# EAGLE board nitwhips_v1.0 (EAGLE 5.09)
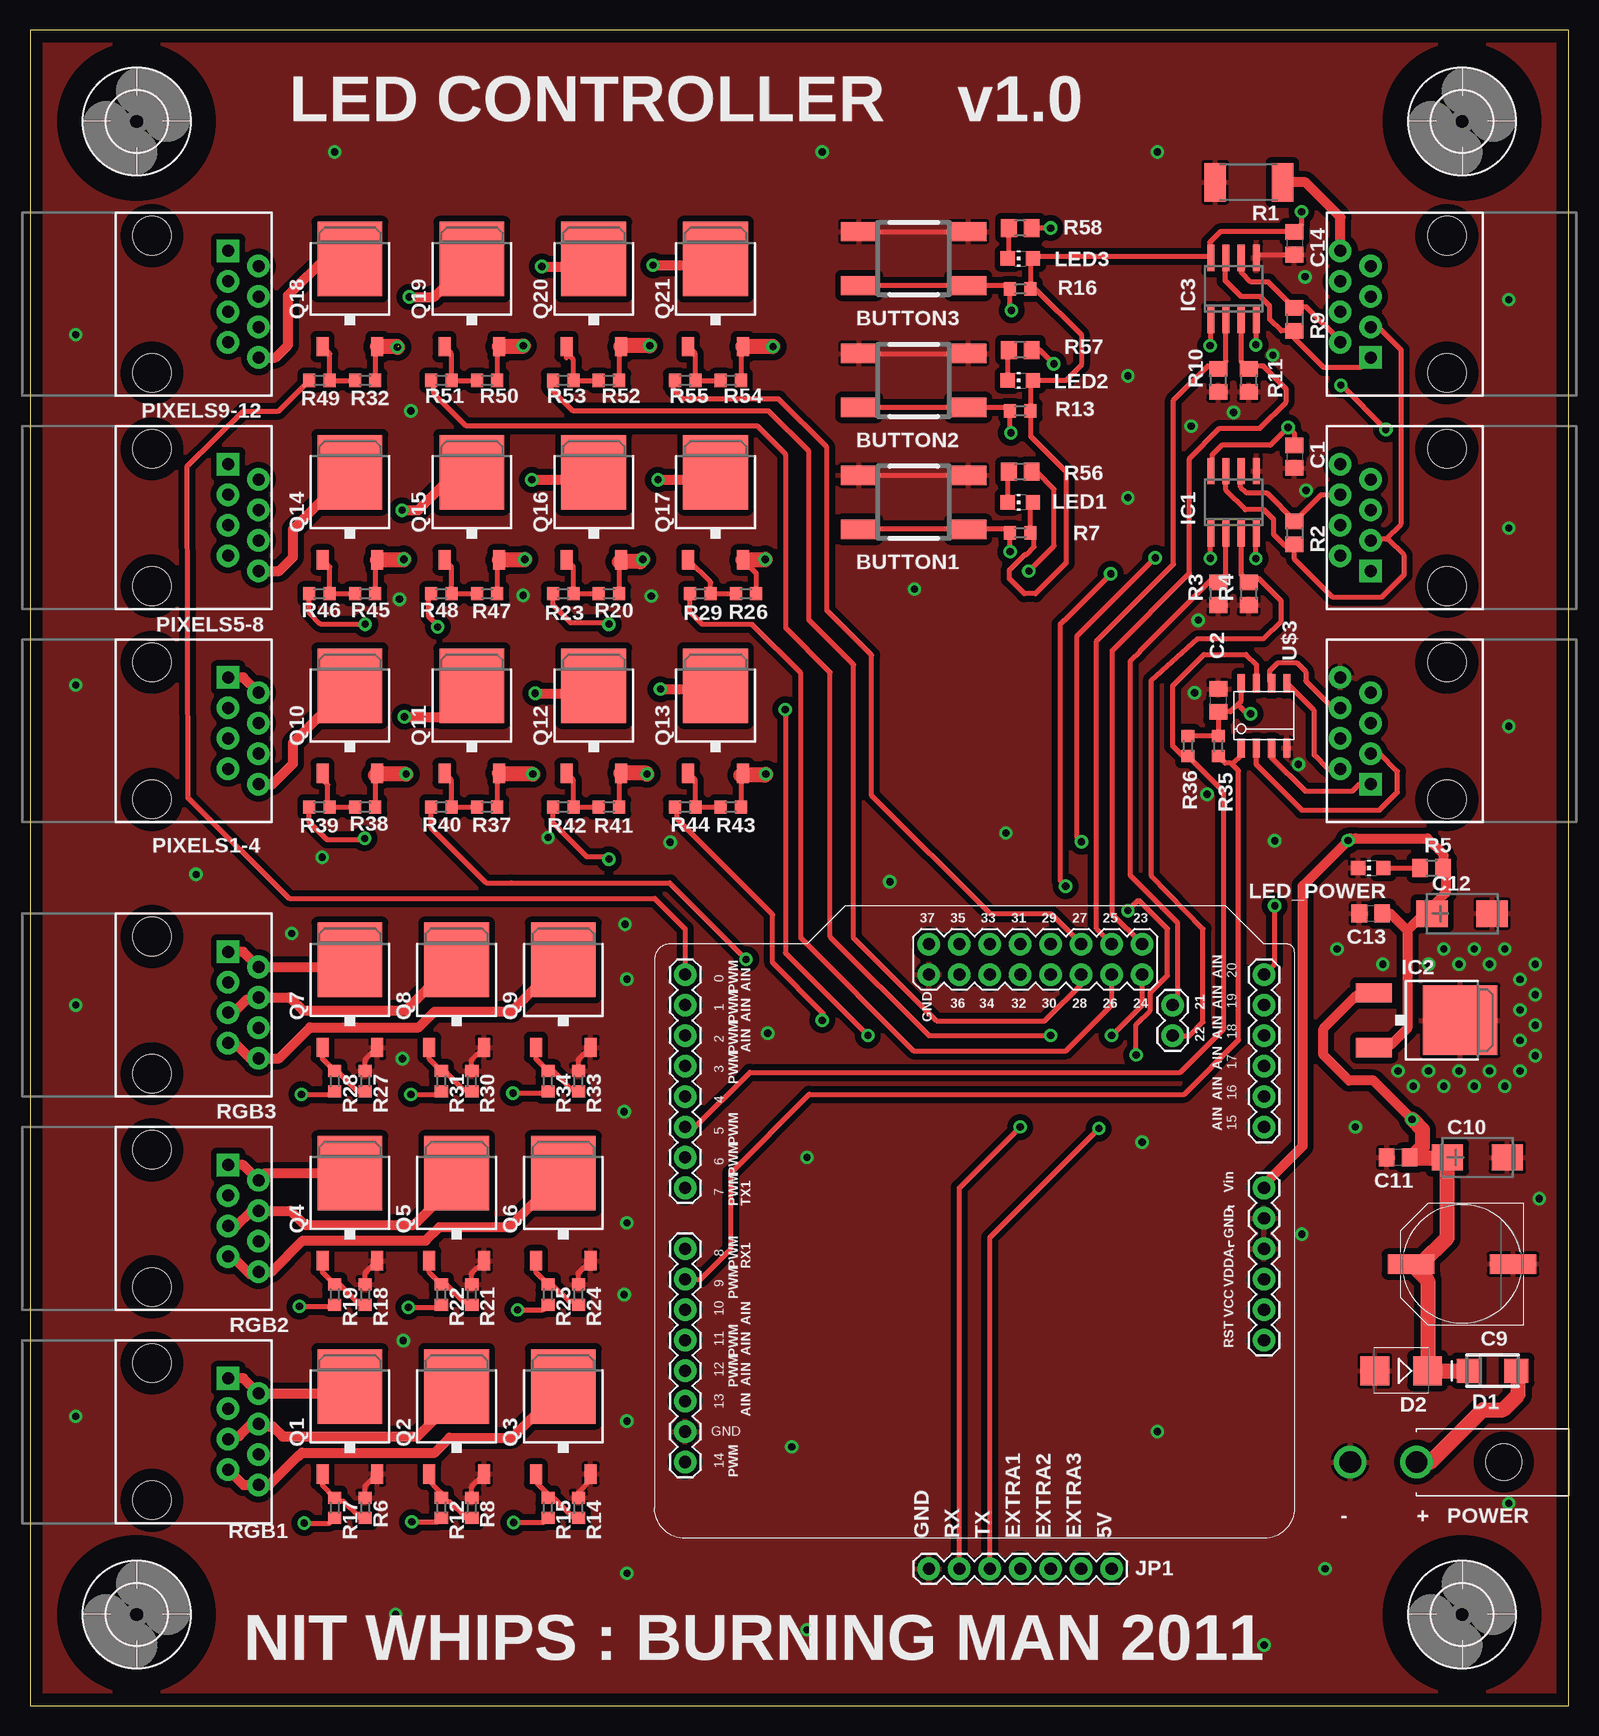
[diagram p0: board, top side]
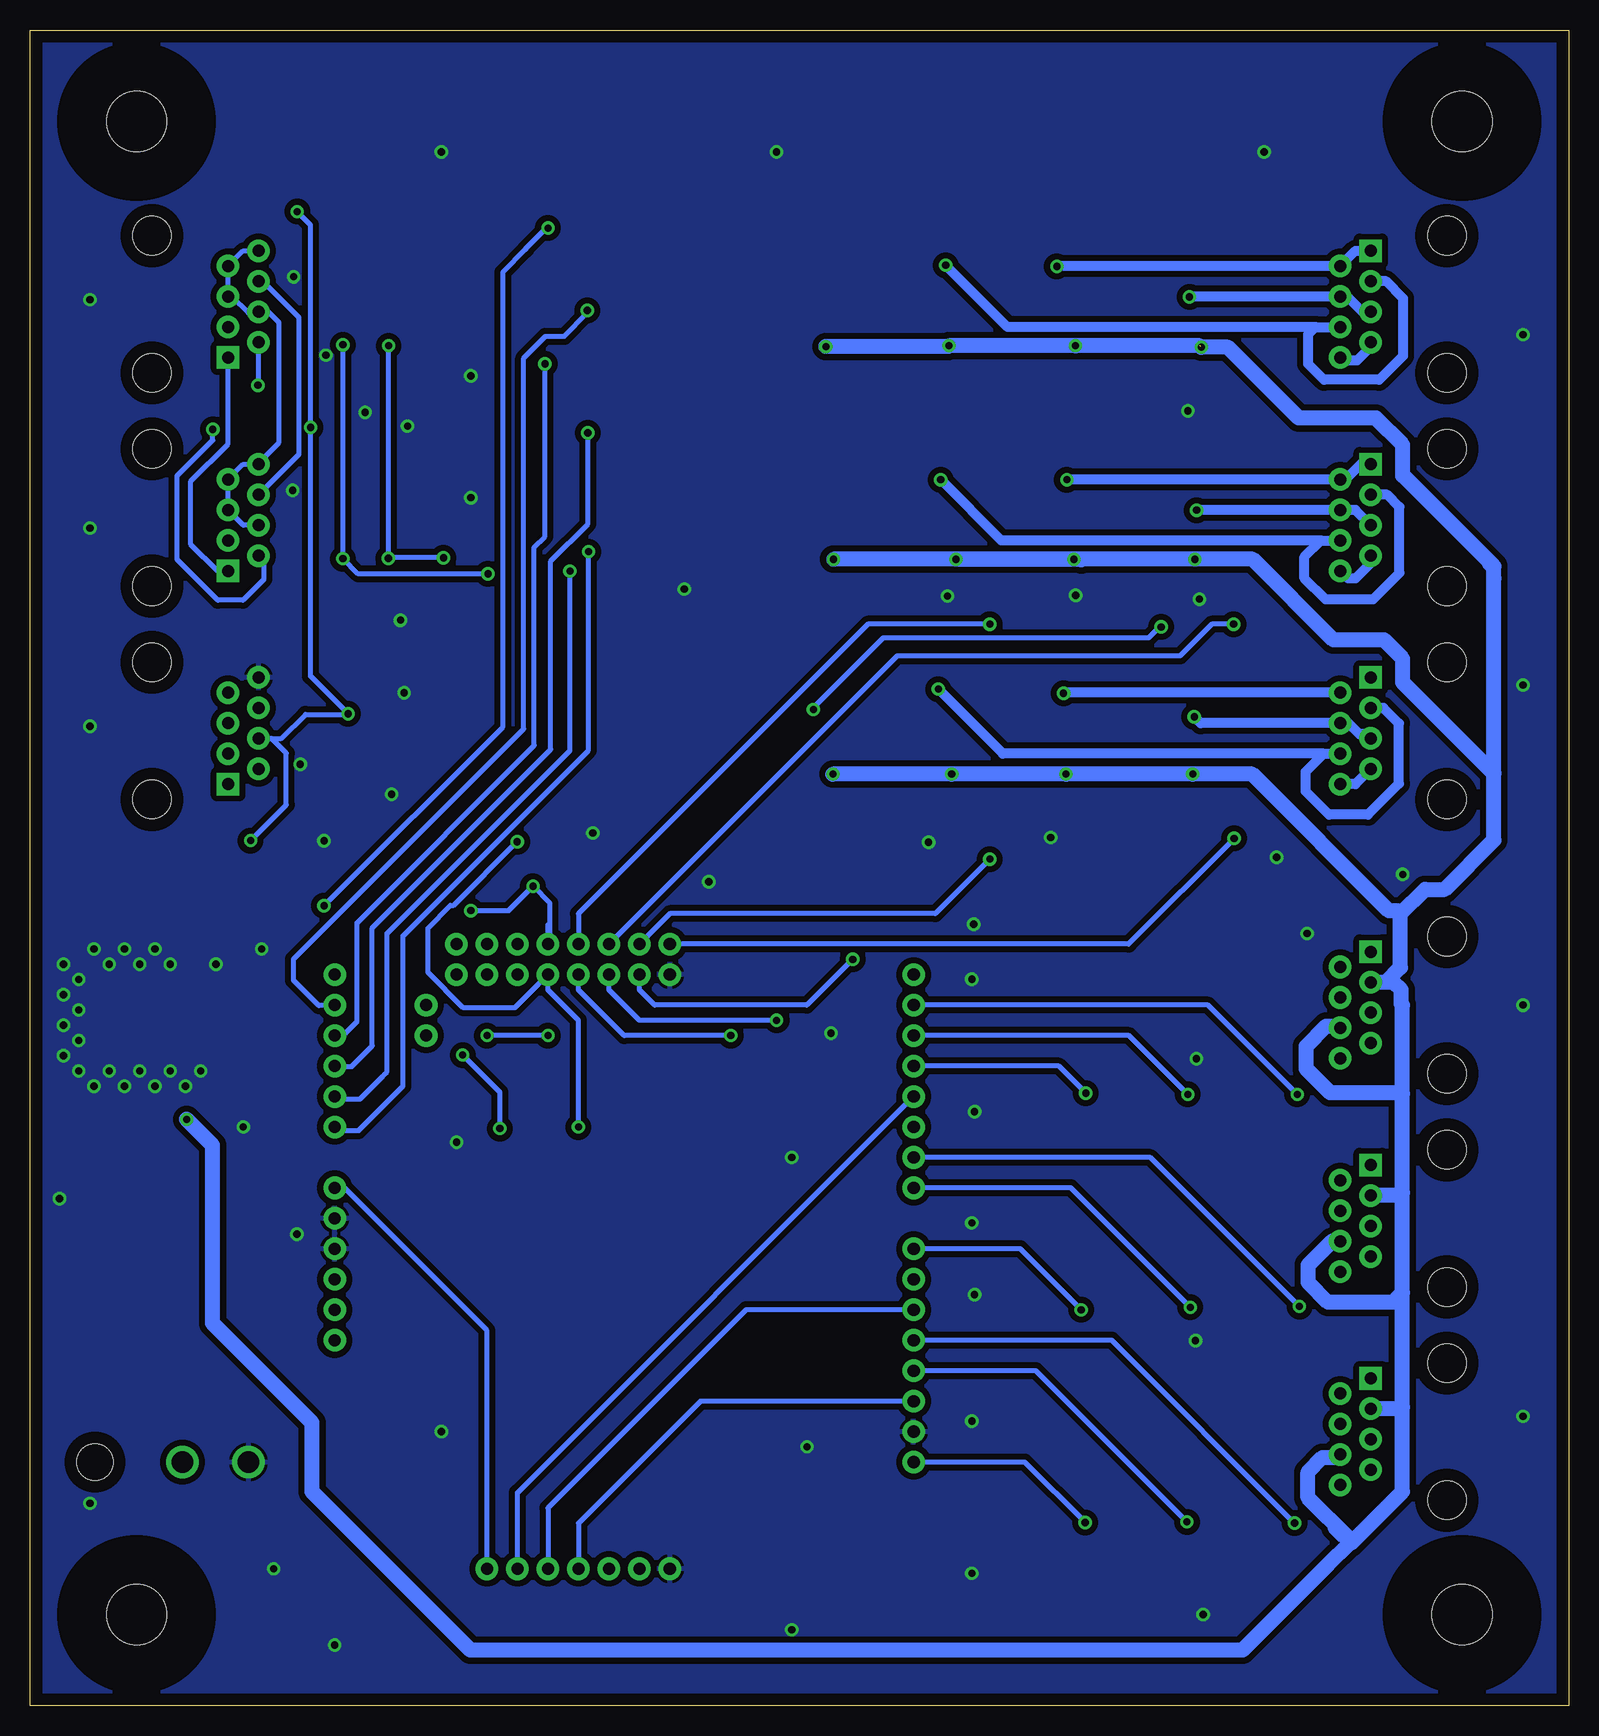
[diagram p1: board, bottom side, seen from below]

Size 128.27 x 139.7 mm. Coordinates in mm from the lower left corner, seen from the top.
Outline: 0,0 128.27,0 128.27,139.7 0,139.7 0,0
Copper layers (1*2+15*16): Top 0.0356mm / dielectric 0.5004mm / Route2 0.0356mm / dielectric 0.5004mm / Route15 0.0356mm / dielectric 0.5004mm / Bottom 0.0356mm
Design rules "ESKI_design_rules": minimum track width 8mil, minimum drill 15mil, track to track 7mil, track to pad 7mil, pad to pad 7mil, via to via 7mil, smd to smd 6mil, copper to edge 40mil, drill to drill 8mil, minimum pad ring 10mil, minimum via ring 10mil, stop-mask expansion 4mil, vias tented up to drill 50mil, thermal gap 10mil

## Footprints (pad centres in the part's own frame; a part is rotated, then mirrored left to right if it is on the bottom)
TL3301 = smd 3 x 1.6: 1 -4.55,2.25; 2 4.55,2.25; 3 -4.55,-2.25; 4 4.55,-2.25
C0805 = smd 1.3 x 1.5: 1 -0.95,0; 2 0.95,0
PANASONIC_G = smd 3.9 x 1.6: + 4.25,0; - -4.25,0
CT6032 = smd 2.6 x 2.2: + -2.5,0; - 2.5,0
SMA = smd 1.999 x 1.999: A -1.994,0; K 1.994,0
SMB = smd 2.4 x 2.4: A 2.2,0; C -2.2,0
5,0 = hole 5: 0,0
SO-08 = smd 0.6 x 2.2: 1 -1.905,-2.6; 2 -0.635,-2.6; 3 0.635,-2.6; 4 1.905,-2.6; 5 1.905,2.6; 6 0.635,2.6; 7 -0.635,2.6; 8 -1.905,2.6
DPACK = smd 1.6 x 3: 1 -2.28,-4.8; 3 2.28,-4.8 | smd 5.8 x 6.2: 4 0,2.38
RJ45-8 = drill 1 pad 1.88 square: 1 -4.445,6.35 | drill 1 pad 1.88 round: 2 -3.175,8.89; 3 -1.905,6.35; 4 -0.635,8.89; 5 0.635,6.35; 6 1.905,8.89; 7 3.175,6.35; 8 4.445,8.89 | hole 3.2: -5.715,0; 5.715,0
1X07 = drill 1.016 pad 1.88 round: 1 0,0; 2 2.54,0; 3 5.08,0; 4 7.62,0; 5 10.16,0; 6 12.7,0; 7 15.24,0
CHIP-LED0805 = smd 1.2 x 1.2: A 0,-1.05; C 0,1.05
2POS_HEADER_4.2MM = drill 1.803 round: + 0,0; - -5.512,0 | hole 2.997: 7.29,0
TO252 = smd 1 x 1.6: 1 -2.28,-4.8; 3 2.28,-4.8 | smd 5.4 x 6.2: 2 0,2.5
TO252' = smd 5.4 x 6.2: D 0,2.5 | smd 1 x 1.6: G -2.28,-4.8; S 2.28,-4.8
R2512 = smd 1.8 x 3.2: 1 -2.8,0; 2 2.8,0
R0805 = smd 1.3 x 1.5: 1 -0.95,0; 2 0.95,0
R0603 = smd 1 x 1.1: 1 -0.85,0; 2 0.85,0
MAPLEBOARD = drill 1.016 pad 1.88 round: 0 46.99,50.8; 1 44.45,50.8; 2 41.91,50.8; 3 39.37,50.8; 4 36.83,50.8; 5 34.29,50.8; 6 31.75,50.8; 7 29.21,50.8; 8 24.13,50.8; 9 21.59,50.8; 10 19.05,50.8; 11 16.51,50.8; 12 13.97,50.8; 13 11.43,50.8; 14 6.35,50.8; 15 34.29,2.54; 16 36.83,2.54; 17 39.37,2.54; 18 41.91,2.54; 19 44.45,2.54; 20 46.99,2.54; 21 44.45,10.16; 22 41.91,10.16; 23 49.53,12.7; 24 46.99,12.7; 25 49.53,15.24; 26 46.99,15.24; 27 49.53,17.78; 28 46.99,17.78; 29 49.53,20.32; 30 46.99,20.32; 31 49.53,22.86; 32 46.99,22.86; 33 49.53,25.4; 34 46.99,25.4; 35 49.53,27.94; 36 46.99,27.94; 37 49.53,30.48; GND0 8.89,50.8; GND1 46.99,30.48; GND2 26.67,2.54; GND3 24.13,2.54; RST 16.51,2.54; VCC 19.05,2.54; VDDA 21.59,2.54; VIN 29.21,2.54
SO-8 = smd 0.6 x 1.55: 1 -1.905,-2.7; 2 -0.635,-2.7; 3 0.635,-2.7; 4 1.905,-2.7; 5 1.905,2.7; 6 0.635,2.7; 7 -0.635,2.7; 8 -1.905,2.7

## Placement (x,y rotation side)
BUTTON1  [TL3301]  73.66,100.33 180 top
BUTTON2  [TL3301]  73.66,110.49 180 top
BUTTON3  [TL3301]  73.66,120.65 180 top
C1  0.1u  [C0805]  105.41,104.14 270 top
C2  0.1u  [C0805]  99.06,83.82 90 top
C9  220u  [PANASONIC_G]  119.38,36.83 180 top
C10  10u  [CT6032]  120.65,45.72 0 top
C11  0.1u  [C0805]  114.05,45.72 180 top
C12  10u  [CT6032]  119.38,66.04 0 top
C13  0.1u  [C0805]  111.76,66.04 180 top
C14  0.1u  [C0805]  105.41,121.92 270 top
D1  MBRA140  [SMA]  121.92,27.94 180 top
D2  1SMB16AT3  [SMB]  114.3,27.94 180 top
H1  MOUNT-HOLE5.0  [5,0]  8.89,7.62 0 top
H2  MOUNT-HOLE5.0  [5,0]  119.38,7.62 0 top
H3  MOUNT-HOLE5.0  [5,0]  8.89,132.08 0 top
H4  MOUNT-HOLE5.0  [5,0]  119.38,132.08 0 top
IC1  SN75176A  [SO-08]  100.33,100.33 0 top
IC2  7805  [DPACK]  116.84,57.15 270 top
IC3  SN75176A  [SO-08]  100.33,118.11 0 top
J1  RJ45-8PTH  [RJ45-8]  118.11,81.28 90 top
JP1  [1X07]  90.17,11.43 180 top
LED1  [CHIP-LED0805]  82.55,100.33 90 top
LED2  [CHIP-LED0805]  82.55,110.49 90 top
LED3  [CHIP-LED0805]  82.55,120.65 90 top
LED_POWER  [CHIP-LED0805]  111.76,69.85 90 top
PIXEL1-4  RJ45-8PTH  [RJ45-8]  10.16,81.28 270 top
PIXEL5-8  RJ45-8PTH  [RJ45-8]  10.16,99.06 270 top
PIXEL9-12  RJ45-8PTH  [RJ45-8]  10.16,116.84 270 top
POWER  2POS_HEADER_4.2MM  [2POS_HEADER_4.2MM]  115.57,20.32 0 top
PWM1  RJ45-8PTH  [RJ45-8]  10.16,22.86 270 top
PWM2  RJ45-8PTH  [RJ45-8]  10.16,40.64 270 top
PWM3  RJ45-8PTH  [RJ45-8]  10.16,58.42 270 top
Q1  NFET  [TO252]  26.67,24.13 0 top
Q2  NFET  [TO252]  35.56,24.13 0 top
Q3  NFET  [TO252]  44.45,24.13 0 top
Q4  NFET  [TO252]  26.67,41.91 0 top
Q5  NFET  [TO252]  35.56,41.91 0 top
Q6  NFET  [TO252]  44.45,41.91 0 top
Q7  NFET  [TO252]  26.67,59.69 0 top
Q8  NFET  [TO252]  35.56,59.69 0 top
Q9  NFET  [TO252]  44.45,59.69 0 top
Q10  FDD4141TO252  [TO252']  26.67,82.55 0 top
Q11  FDD4141TO252  [TO252']  36.83,82.55 0 top
Q12  FDD4141TO252  [TO252']  46.99,82.55 0 top
Q13  FDD4141TO252  [TO252']  57.15,82.55 0 top
Q14  FDD4141TO252  [TO252']  26.67,100.33 0 top
Q15  FDD4141TO252  [TO252']  36.83,100.33 0 top
Q16  FDD4141TO252  [TO252']  46.99,100.33 0 top
Q17  FDD4141TO252  [TO252']  57.15,100.33 0 top
Q18  FDD4141TO252  [TO252']  26.67,118.11 0 top
Q19  FDD4141TO252  [TO252']  36.83,118.11 0 top
Q20  FDD4141TO252  [TO252']  46.99,118.11 0 top
Q21  FDD4141TO252  [TO252']  57.15,118.11 0 top
R1  100  [R2512]  101.6,127 180 top
R2  120  [R0805]  105.41,97.79 270 top
R3  10k  [R0805]  99.06,92.71 90 top
R4  10k  [R0805]  101.6,92.71 90 top
R5  470  [R0805]  116.84,69.85 0 top
R6  10k  [R0603]  27.94,16.51 270 top
R7  100  [R0603]  82.55,97.79 0 top
R8  10k  [R0603]  36.83,16.51 270 top
R9  120  [R0805]  105.41,115.57 270 top
R10  10k  [R0805]  99.06,110.49 90 top
R11  10k  [R0805]  101.6,110.49 90 top
R12  100  [R0603]  34.29,16.51 270 top
R13  100  [R0603]  82.55,107.95 0 top
R14  10k  [R0603]  45.72,16.51 270 top
R15  100  [R0603]  43.18,16.51 270 top
R16  100  [R0603]  82.55,118.11 0 top
R17  100  [R0603]  25.4,16.51 270 top
R18  10k  [R0603]  27.94,34.29 270 top
R19  100  [R0603]  25.4,34.29 270 top
R20  10k  [R0603]  48.26,92.71 0 top
R21  10k  [R0603]  36.83,34.29 270 top
R22  100  [R0603]  34.29,34.29 270 top
R23  100  [R0603]  44.45,92.71 180 top
R24  10k  [R0603]  45.72,34.29 270 top
R25  100  [R0603]  43.18,34.29 270 top
R26  10k  [R0603]  59.69,92.71 0 top
R27  10k  [R0603]  27.94,52.07 270 top
R28  100  [R0603]  25.4,52.07 270 top
R29  100  [R0603]  55.88,92.71 180 top
R30  10k  [R0603]  36.83,52.07 270 top
R31  100  [R0603]  34.29,52.07 270 top
R32  10k  [R0603]  27.94,110.49 0 top
R33  10k  [R0603]  45.72,52.07 270 top
R34  100  [R0603]  43.18,52.07 270 top
R35  10K  [R0603]  99.06,80.01 270 top
R36  10K  [R0603]  96.52,80.01 270 top
R37  10k  [R0603]  38.1,74.93 0 top
R38  10k  [R0603]  27.94,74.93 0 top
R39  100  [R0603]  24.13,74.93 180 top
R40  100  [R0603]  34.29,74.93 180 top
R41  10k  [R0603]  48.26,74.93 0 top
R42  100  [R0603]  44.45,74.93 180 top
R43  10k  [R0603]  58.42,74.93 0 top
R44  100  [R0603]  54.61,74.93 180 top
R45  10k  [R0603]  27.94,92.71 0 top
R46  100  [R0603]  24.13,92.71 180 top
R47  10k  [R0603]  38.1,92.71 0 top
R48  100  [R0603]  34.29,92.71 180 top
R49  100  [R0603]  24.13,110.49 180 top
R50  10k  [R0603]  38.1,110.49 0 top
R51  100  [R0603]  34.29,110.49 180 top
R52  10k  [R0603]  48.26,110.49 0 top
R53  100  [R0603]  44.45,110.49 180 top
R54  10k  [R0603]  58.42,110.49 0 top
R55  100  [R0603]  54.61,110.49 180 top
R56  10k  [R0805]  82.55,102.87 180 top
R57  10k  [R0805]  82.55,113.03 180 top
R58  10k  [R0805]  82.55,123.19 180 top
TXRX_IN  RJ45-8PTH  [RJ45-8]  118.11,116.84 90 top
TXRX_OUT  RJ45-8PTH  [RJ45-8]  118.11,99.06 90 top
U$2  MAPLEBOARD  [MAPLEBOARD]  105.41,13.97 90 top
U$3  P82B96-PCA9600SO-8  [SO-8]  102.87,82.55 0 top

## Library data of the parts
BUTTON1-BUTTON3 = E-switch
C1 C2 C9-C14 R1-R58 = rcl
D1 D2 = diode
H1-H4 = holes
IC1 IC3 = texas
IC2 = v-reg
J1 JP1 PIXEL1-4 PIXEL5-8 PIXEL9-12 PWM1-PWM3 TXRX_IN TXRX_OUT = SparkFun
LED1-LED3 LED_POWER = led
POWER = vadim
Q1-Q9 = vincent
Q10-Q21 = transistor-fet
U$2 = NITWHIPS
U$3 = Sparky

## Nets
+5V: C1.1 C2.1 C12.+ C13.1 C14.1 IC1.8 IC2.3 IC3.8 J1.4 JP1.1 LED1.A LED2.A LED3.A R5.2 R7.2 R13.2 R16.2 R35.1 R36.1 U$2.VIN U$3.8
+24V: C9.+ C10.+ C11.1 D1.K D2.C IC2.1 PWM1.3 PWM1.6 PWM2.3 PWM2.6 PWM3.3 PWM3.6 Q10.S Q11.S Q12.S Q13.S Q14.S Q15.S Q16.S Q17.S Q18.S Q19.S Q20.S Q21.S R20.2 R26.2 R32.2 R37.2 R38.2 R41.2 R43.2 R45.2 R47.2 R50.2 R52.2 R54.2
ACC_RX: J1.3 U$3.2
ACC_RY: J1.6 U$3.6
ACC_TX: J1.1 U$3.3
ACC_TY: J1.2 U$3.5
B1: PWM1.7 PWM1.8 Q3.2
B2: PWM2.7 PWM2.8 Q6.2
B3: PWM3.7 PWM3.8 Q9.2
BUTTON1: BUTTON1.1 BUTTON1.2 R7.1 U$2.15
BUTTON2: BUTTON2.1 BUTTON2.2 R13.1 U$2.17
BUTTON3: BUTTON3.1 BUTTON3.2 R16.1 U$2.19
DIF_A: IC3.6 R9.1 TXRX_IN.2 TXRX_OUT.2
DIF_A1: IC1.6 R2.1 TXRX_IN.6 TXRX_OUT.6
DIF_B: IC3.7 R9.2 TXRX_IN.1 TXRX_OUT.1
DIF_B1: IC1.7 R2.2 TXRX_IN.3 TXRX_OUT.3
EXTRA1: JP1.4 U$2.13
EXTRA2: JP1.3 U$2.10
EXTRA3: JP1.2 U$2.4
G1: PWM1.4 PWM1.5 Q2.2
G2: PWM2.4 PWM2.5 Q5.2
G3: PWM3.4 PWM3.5 Q8.2
GND: BUTTON1.3 BUTTON1.4 BUTTON2.3 BUTTON2.4 BUTTON3.3 BUTTON3.4 C1.2 C2.2 C9.- C10.- C11.2 C12.- C13.2 C14.2 D2.A IC1.5 IC2.4 IC3.5 J1.8 JP1.7 LED_POWER.C POWER.- Q1.3 Q2.3 Q3.3 Q4.3 Q5.3 Q6.3 Q7.3 Q8.3 Q9.3 R1.2 R3.1 R4.1 R6.1 R8.1 R10.1 R11.1 R14.1 R18.1 R21.1 R24.1 R27.1 R30.1 R33.1 U$2.GND0 U$2.GND1 U$2.GND2 U$2.GND3 U$3.4
LED1: R56.1 U$2.16
LED2: R57.1 U$2.18
LED3: R58.1 U$2.20
N$1: LED_POWER.A R5.1
N$2: Q2.1 R8.2 R12.1
N$3: Q18.G R32.1 R49.1
N$4: R1.1 TXRX_IN.4 TXRX_IN.5 TXRX_IN.7 TXRX_IN.8 TXRX_OUT.4 TXRX_OUT.5 TXRX_OUT.7 TXRX_OUT.8
N$5: D1.A POWER.+
N$6: Q19.G R50.1 R51.1
N$8: Q3.1 R14.2 R15.1
N$9: Q20.G R52.1 R53.1
N$10: Q4.1 R18.2 R19.1
N$11: LED1.C R56.2
N$12: Q5.1 R21.2 R22.1
N$13: Q16.G R20.1 R23.1
N$14: Q6.1 R24.2 R25.1
N$15: Q17.G R26.1 R29.1
N$16: Q7.1 R27.2 R28.1
N$17: Q21.G R54.1 R55.1
N$18: Q8.1 R30.2 R31.1
N$19: Q1.1 R6.2 R17.1
N$20: LED2.C R57.2
N$21: Q9.1 R33.2 R34.1
N$22: Q11.G R37.1 R40.1
N$23: Q12.G R41.1 R42.1
N$24: Q10.G R38.1 R39.1
N$25: Q13.G R43.1 R44.1
N$26: Q14.G R45.1 R46.1
N$27: Q15.G R47.1 R48.1
N$28: LED3.C R58.2
P1: R39.2 U$2.37
P1+: PIXEL1-4.7 PIXEL1-4.8 Q10.D
P2: R40.2 U$2.36
P2+: PIXEL1-4.4 PIXEL1-4.5 Q11.D
P3: R42.2 U$2.35
P3+: PIXEL1-4.1 PIXEL1-4.2 Q12.D
P4: R44.2 U$2.34
P4+: PIXEL1-4.3 PIXEL1-4.6 Q13.D
P5: R46.2 U$2.33
P5+: PIXEL5-8.7 PIXEL5-8.8 Q14.D
P6: R48.2 U$2.32
P6+: PIXEL5-8.4 PIXEL5-8.5 Q15.D
P7: R23.2 U$2.31
P7+: PIXEL5-8.1 PIXEL5-8.2 Q16.D
P8: R29.2 U$2.26
P8+: PIXEL5-8.3 PIXEL5-8.6 Q17.D
P9: R49.2 U$2.0
P9+: PIXEL9-12.7 PIXEL9-12.8 Q18.D
P10: R51.2 U$2.24
P10+: PIXEL9-12.4 PIXEL9-12.5 Q19.D
P11: R53.2 U$2.28
P11+: PIXEL9-12.1 PIXEL9-12.2 Q20.D
P12: R55.2 U$2.27
P12+: PIXEL9-12.3 PIXEL9-12.6 Q21.D
PWM_B1: R15.2 U$2.14
PWM_B2: R25.2 U$2.8
PWM_B3: R34.2 U$2.3
PWM_G1: R12.2 U$2.12
PWM_G2: R22.2 U$2.7
PWM_G3: R31.2 U$2.2
PWM_R1: R17.2 U$2.11
PWM_R2: R19.2 U$2.6
PWM_R3: R28.2 U$2.1
R1: PWM1.1 PWM1.2 Q1.2
R2: PWM2.1 PWM2.2 Q4.2
R3: PWM3.1 PWM3.2 Q7.2
RX: IC1.1 IC3.1 JP1.6 U$2.30
RX_EN1: IC3.2 R10.2 U$2.25
RX_EN2: IC1.2 R3.2 U$2.21
SCL: R36.2 U$2.5 U$3.7
SDA: R35.2 U$2.9 U$3.1
TX: IC1.4 IC3.4 JP1.5 U$2.29
TX_EN1: IC3.3 R11.2 U$2.23
TX_EN2: IC1.3 R4.2 U$2.22

## Tracks (layer width: path | path; a pad name or v marks a point on that pad's centre or on a via)
+5V  (via drill 0.6)
  Top 0.406: 98.35,120.79 98.35,122 99.22,122.87 C14.1 105.99,123.45 v105.99,124.56 | 98.35,120.79 IC3.8 | R36.1 R35.1 C2.1 100.07,82.87 100.67,83.48 | 100.67,83.48 100.97,83.77 U$3.8 | v101.75,82.7 101.45,82.7 100.67,83.48 | LED1.A 83.82,100.33 83.4,99.91 R7.2 83.69,97.5 83.69,96.6 83.08,95.99 82.96,95.99 81.64,94.67 81.64,93.96 82.88,92.71 83.82,92.71 86.36,95.25 86.36,102.87 83.4,105.83 R13.2 83.4,110.29 LED2.A 86.36,110.49 87.63,111.76 87.63,114.3 83.82,118.11 R16.2 83.4,120.45 LED3.A 83.74,120.79 98.35,120.79 | IC1.8 98.53,103.03 98.53,104.27 99.35,105.09 103.39,105.09 v104.88,106.58 105.41,106.04 C1.1 | v109.88,72.14 110.31,72.14 110.49,72.31
  Top 0.813: 111.7,54.87 IC2.3 112.34,55.17 113.51,55.17 114.81,56.46 114.81,64.62 | C13.1 113.39,66.04 114.81,64.62 | 114.81,64.62 116.23,66.04 C12.+ 116.88,66.64 118.03,67.79 118.03,69.32 | 118.03,69.32 118.03,69.61 R5.2 | U$2.VIN 102.87,43.43 106.1,46.66 106.1,68.35 v109.88,72.14 110.06,72.31 110.49,72.31 116.48,72.31 117.81,70.99 117.81,69.55 118.03,69.32
  Bottom 0.406: v105.99,124.56 104.88,123.44 v104.88,106.58 104.88,85.83 v101.75,82.7 101.8,82.65 105.31,82.65 107.31,80.65 J1.4 108.13,80.65 106.91,79.43 106.91,75.11 v109.88,72.14 | JP1.1 90.17,31.29 102.34,43.46 102.59,43.46 U$2.VIN
+24V  (via drill 0.6)  (1 unrouted)
  Top 0.406: R52.2 49.11,113.15 Q20.S | R50.2 38.95,113.15 Q19.S | R32.2 28.79,113.15 Q18.S | R45.2 28.79,95.37 Q14.S | R47.2 38.95,95.37 Q15.S | R20.2 49.11,95.37 Q16.S | R26.2 60.54,94.42 Q17.S | R43.2 59.27,77.59 Q13.S | R41.2 49.11,77.59 Q12.S | R37.2 38.95,77.59 Q11.S | R38.2 28.79,77.59 Q10.S | R54.2 59.27,113.15 Q21.S
  Top 0.813: IC2.1 111.82,59.21 110.57,59.21 107.82,56.46 107.82,54.25 109.96,52.12 111.99,52.12 v115.21,48.9
  Top 1.27: D1.K D2.C 116.5,35.46 C9.+ 115.95,36.83 118.11,38.99 118.11,45.68 | 118.11,45.68 C10.+ | 118.11,45.68 115.04,45.68 C11.1 115.19,45.72 116.08,46.61 116.08,48.03 v115.21,48.9 | Q21.S v61.92,113.31 | v51.66,113.39 49.35,113.39 Q20.S | Q19.S 41.05,113.31 v41.12,113.39 | Q17.S 61.24,95.53 v61.29,95.58 | 59.27,77.59 61.26,77.59 v61.34,77.67 | Q14.S 31.12,95.53 v31.17,95.58 | Q15.S 41.2,95.53 v41.25,95.58 | 49.11,95.37 50.87,95.37 v51.08,95.58 | Q12.S 51.36,77.75 v51.44,77.67 | Q11.S 39.19,77.67 v41.91,77.67 | 28.79,77.59 28.87,77.67 v31.34,77.67 | Q18.S 30.58,113.31 v30.63,113.26
  Bottom 0.406: 6.58,95.2 6.58,94.31 6.25,93.98
  Bottom 0.813: 13.87,34.47 14.17,34.16 | PWM1.6 19.66,20.95 | 19.48,14.88 19.48,15.24 | 13.87,51.05 13.92,51.1
  Bottom 1.27: 13.87,24.92 13.87,17.86 18.16,13.56 18.26,13.56 | 13.87,24.92 13.87,34.47 13.87,42.8 | 13.87,42.8 13.87,51.05 13.87,58.42 13.97,58.52 13.97,59.69 14.61,60.33 15.24,60.33 | 15.24,60.33 PWM3.3 | PWM2.3 14.12,42.55 13.87,42.8 | PWM1.3 14.02,24.77 13.87,24.92 | 18.26,13.56 20.12,11.71 20.14,11.71 27.2,4.65 91.54,4.65 104.75,17.86 104.75,23.6 113.06,31.9 113.06,46.74 v115.21,48.9 | v61.92,113.31 51.74,113.31 v51.66,113.39 v41.12,113.39 30.76,113.39 | v51.08,95.58 v41.25,95.58 v31.17,95.58 26.34,95.58 19.61,88.85 15.39,88.85 13.84,87.3 13.84,85.32 6.25,77.72 | v51.08,95.58 v61.29,95.58 | 6.25,77.72 6.25,72.16 10.34,68.07 11.99,68.07 14.02,66.04 | 14.02,66.04 14.02,61.54 15.24,60.33 | 13.84,102.59 13.84,102.51 | 13.84,102.59 13.84,105.13 16.08,107.37 22.5,107.37 28.4,113.26 v30.63,113.26 30.68,113.31 | 6.58,95.2 6.6,95.2 | 6.25,77.72 6.25,93.98 6.25,95 13.84,102.59 | v61.34,77.67 v51.44,77.67 v41.91,77.67 v31.34,77.67 26.39,77.67 14.99,66.27 14.25,66.27 14.02,66.04 | v51.08,95.58 40.69,95.58 40.64,95.53 | 13.92,51.1 19.89,51.1 21.89,53.11 21.89,54.99 20.22,56.67 19.2,56.67 PWM3.6 | PWM2.6 19.74,38.73 21.72,36.75 21.72,35.31 20.07,33.66 14.68,33.66 14.17,34.16 | 18.26,13.87 18.26,13.56 | 18.26,13.87 21.74,17.35 21.74,19.48 20.52,20.7 19.3,20.7 PWM1.6 | 18.26,13.87 18.26,13.89 18.47,14.1 18.69,14.1 19.48,14.88
ACC_RX
  Top 0.406: J1.3 112.52,79.38 114,77.9 114,76.18 112.5,74.68 106.02,74.68 102.21,78.49 102.21,79.82 U$3.2
ACC_RY
  Top 0.406: J1.6 108.61,83.19 106.35,85.45 106.35,86.21 105.59,86.97 104.04,86.97 103.35,86.28 103.35,85.4 U$3.6
ACC_TX
  Top 0.406: J1.1 110.8,76.84 110.21,76.25 106.3,76.25 103.45,79.1 103.45,79.8 U$3.3
ACC_TY
  Top 0.406: J1.2 108.2,78.1 107.06,79.25 107.06,82.96 U$3.5
B1
  Top 0.813: PWM1.7 17.78,18.41 PWM1.8 19.94,18.41 22.35,20.83 22.4,20.83 22.68,21.11 33.73,21.11 34.98,22.35 40.17,22.35 Q3.2
B2
  Top 0.813: PWM2.7 16.84,37.47 18.31,35.99 18.85,35.99 PWM2.8 20.14,36.2 22.73,38.79 33,38.79 34.14,39.93 39.97,39.93 Q6.2
B3
  Top 0.813: PWM3.7 17.07,55.24 18.54,53.77 18.85,53.77 PWM3.8 20.75,53.98 23.34,56.57 32.41,56.57 33.73,57.89 40.15,57.89 Q9.2
BUTTON1  (via drill 0.6)
  Top 0.406: BUTTON1.2 BUTTON1.1 81.41,98.08 R7.1 v81.7,96.23 v81.71,96.22
  Bottom 0.406: v81.71,96.22 81.71,79.65 97.18,64.19 97.18,51.66 100.91,47.93 102.54,47.93 U$2.15
BUTTON2  (via drill 0.6)
  Top 0.406: BUTTON2.2 BUTTON2.1 81.41,108.24 R13.1 81.7,106.18 v81.76,106.12
  Bottom 0.406: v81.76,106.12 81.76,98.53 84.86,95.43 84.86,79.73 99.75,64.85 99.75,55.02 101.5,53.26 102.79,53.26 U$2.17
BUTTON3  (via drill 0.6)
  Top 0.406: BUTTON3.2 BUTTON3.1 81.41,118.4 R16.1 81.7,116.44 v81.81,116.33
  Bottom 0.406: v81.81,116.33 81.81,116.08 83.72,114.17 85.29,114.17 87.12,112.34 87.12,81.43 106.3,62.26 106.3,60.48 104.19,58.37 102.92,58.37 U$2.19
DIF_A  (via drill 0.6)
  Top 0.406: TXRX_IN.2 109.22,113.79 106.4,116.61 105.5,116.61 R9.1 103.24,118.69 101.78,118.69 100.97,119.51 IC3.6 | v109.27,110.08 109.35,110.08 v113.03,106.4
  Bottom 0.406: TXRX_IN.2 109.22,110.13 v109.27,110.08 | TXRX_OUT.2 108.76,95.43 108.76,93.93 110.52,92.18 112.62,92.18 116,95.56 116,102.54 113.03,105.51 v113.03,106.4
DIF_A1
  Top 0.406: TXRX_OUT.6 107.64,100.97 R2.1 105.41,98.81 103.1,101.12 101.4,101.12 100.91,101.6 100.91,102.88 IC1.6
  Bottom 0.406: TXRX_IN.6 108.86,118.75 105.84,115.72 105.84,104.34 TXRX_OUT.6
DIF_B
  Top 0.406: IC3.7 99.64,120.66 99.64,118.8 100.97,117.47 102.56,117.47 103.35,116.69 103.35,115.57 104.3,114.62 R9.2 105.41,114 107.85,111.56 110.92,111.56 TXRX_IN.1
  Bottom 0.406: TXRX_OUT.1 111.78,94.59 112.62,94.59 114.86,96.82 114.86,102.08 111.76,105.18 TXRX_IN.1
DIF_B1
  Top 0.406: IC1.7 99.7,101.32 101.3,99.72 102.87,99.72 103.68,98.91 103.68,97.64 104.65,96.67 105.24,96.67 R2.2 105.41,95.58 108.56,92.43 112.7,92.43 114.55,94.28 114.55,95.91 113.21,97.26 113.03,97.26 | 113.03,97.26 111.12,97.26 111.1,97.23 111.68,97.23 TXRX_OUT.3 | TXRX_IN.3 112.4,114.94 114.3,113.03 114.3,98.53 113.03,97.26
EXTRA1
  Bottom 0.406: U$2.13 72.39,25.4 82.55,15.24 JP1.4
EXTRA2
  Bottom 0.406: JP1.3 85.09,16.51 68.58,33.02 U$2.10
EXTRA3
  Bottom 0.406: JP1.2 87.63,17.78 U$2.4
G1
  Top 0.813: Q2.2 35.56,25.7 32.31,22.45 21.06,22.45 20.19,23.32 19.23,23.32 PWM1.4 18.44,23.49 17.45,22.5 16.79,22.5 PWM1.5
G2
  Top 0.813: PWM2.5 17.2,40 18.47,41.27 PWM2.4 21.72,41.27 22.89,40.11 32.03,40.11 33.55,41.63 33.55,42.4 Q5.2
G3
  Top 0.813: PWM3.5 16.97,57.78 18.06,58.88 18.87,58.88 PWM3.4 21.67,59.05 22.76,57.96 31.33,57.96 Q8.2
GND  (via drill 0.6)
  Top 0.406: R6.1 27.94,18.32 Q1.3 | R27.1 27.94,53.88 Q7.3 | R8.1 36.83,18.32 Q2.3 | Q3.3 46.73,18.79 45.72,17.78 R14.1 | R30.1 36.83,53.88 Q8.3 | R33.1 45.72,53.88 Q9.3 | R18.1 27.94,36.1 Q4.3 | R21.1 36.83,36.1 Q5.3 | R24.1 45.72,36.1 Q6.3 | C14.2 102.5,120.97 IC3.5 | BUTTON3.4 BUTTON3.3 | BUTTON2.4 BUTTON2.3 | BUTTON1.4 BUTTON1.3 | C2.2 99.38,84.77
  other vias: 3.81,58.42 64.77,45.72 43.18,72.39 31.75,107.95 25.4,129.54 66.04,129.54 93.98,129.54 3.81,85.09 30.48,7.62 64.77,6.35 102.87,5.08 93.98,22.86 92.71,46.99 63.5,21.59 49.53,34.29 49.53,49.53 49.61,65.15 91.52,110.87 123.27,117.22 123.27,98.17 123.27,81.66 125.81,42.29 81.36,72.77 73.74,93.09 91.52,100.71 106.38,101.32 71.68,68.71 100.33,107.82 96.8,106.68 103.61,112.6 106.3,119.13 97.08,84.46 105.74,78.49 97.38,90.5 108.97,63.09 112.78,61.82 124.21,52.93 123.27,16.89 106.02,39.32 3.81,24.13 3.81,114.3 31.11,30.45 31.04,53.95 53.37,71.98 24.36,70.74 61.49,56.08 103.76,72.11 98.12,76 30.78,92.25 124.21,60.55 124.21,58.01 124.21,55.47 121.67,61.82 117.86,63.09 116.59,61.82 119.13,61.82 121.67,52.93 119.13,52.93 116.59,52.93 114.05,52.93 115.32,51.66 117.86,51.66 120.4,51.66 122.94,51.66 125.48,54.2 125.48,56.74 125.48,59.28 125.48,61.82 120.4,63.09 122.94,63.09 41.1,92.58 51.79,92.51 13.84,69.32 21.82,64.39 49.76,60.58 49.76,40.26 49.76,23.75 49.76,11.05 110.49,48.26 107.95,11.43
  pour Top (isolate 0.508): 0,139.7 128.27,139.7 128.27,-1.27 0,-1.27
  pour Bottom (isolate 0.508): 0,139.7 128.27,139.7 128.27,0 0,0
LED1  (via drill 0.6)
  Top 0.406: R56.1 83.92,102.87 85.37,101.42 85.37,96.7 v83.26,94.59
  Bottom 0.406: U$2.16 102.64,50.57 100.79,50.57 98.9,52.46 98.73,52.63 98.5,52.86 98.5,64.39 83.26,79.63 v83.26,94.59
LED2  (via drill 0.6)
  Top 0.406: R57.1 84.18,113.03 v85.34,111.86
  Bottom 0.406: v85.34,111.86 85.34,97.49 86.23,96.6 86.23,80.06 101.02,65.28 101.02,57.07 102.31,55.78 102.77,55.78 U$2.18
LED3  (via drill 0.6)
  Top 0.406: v85.09,123.19 R58.1 | v103.76,66.7 103.76,61.85 U$2.20
  Bottom 0.406: v85.09,123.19 85.24,123.19 86.94,121.49 86.94,121.41 88.85,119.51 88.85,81.61 v103.76,66.7
N$1
  Top 0.406: LED_POWER.A R5.1
N$2
  Top 0.406: R8.2 36.33,15.66 34.98,17.02 34.63,17.02 R12.1 34.29,17.78 33.02,19.05 33.28,19.31 Q2.1
N$3
  Top 0.406: Q18.G 24.98,112.72 R49.1 R32.1
N$4
  Top 0.813: R1.1 106.32,127 109.25,124.08 109.25,121.31 TXRX_IN.8
  Bottom 0.406: TXRX_OUT.4 110.49,98.43 TXRX_OUT.5 TXRX_OUT.7 110.49,103.5 TXRX_OUT.8 109.22,103.61 107.52,105.31 107.52,115.32 108.51,116.31 109.12,116.31 TXRX_IN.4 109.35,116.08 110.06,116.08 111.45,117.47 TXRX_IN.5 TXRX_IN.7 110.49,121.28 TXRX_IN.8
N$5
  Top 1.27: POWER.+ 116.74,20.32 121.11,24.69 122.81,24.69 124.05,25.93 124.05,27.8 D1.A
N$6
  Top 0.406: R50.1 R51.1 35.14,112.72 Q19.G
N$8
  Top 0.406: R14.2 45.33,15.66 43.69,17.3 43.24,17.3 R15.1 43.18,17.65 42.29,18.54 42.29,19.21 Q3.1
N$9
  Top 0.406: 44.71,112.8 44.71,112.35 | 44.71,112.8 Q20.G | 44.71,112.8 45.3,112.21 R53.1 R52.1
N$10
  Top 0.406: Q4.1 24.39,36.15 R19.1 25.79,35.14 27.38,33.55 27.83,33.55 R18.2
N$11
  Top 0.406: LED1.C 81.5,102.77 R56.2
N$12
  Top 0.406: Q5.1 33.28,36.15 R22.1 34.69,35.14 36.17,33.66 36.61,33.66 R21.2
N$13
  Top 0.406: Q16.G 45.3,94.94 R23.1 R20.1
N$14
  Top 0.406: Q6.1 42.17,36.15 R25.1 43.5,35.14 44.93,33.71 45.45,33.71 R24.2
N$15
  Top 0.406: Q17.G 56.73,93.67 R29.1 R26.1
N$16
  Top 0.406: Q7.1 24.39,53.93 R28.1 25.62,52.92 27.28,51.26 27.9,51.26 R27.2
N$17
  Top 0.406: 54.61,113.03 54.87,113.29 Q21.G 55.46,112.72 R55.1 R54.1
N$18
  Top 0.406: Q8.1 33.28,53.93 R31.1 34.58,52.92 36.19,51.31 36.74,51.31 R30.2
N$19
  Top 0.406: Q1.1 24.39,18.37 R17.1 25.69,17.07 26.11,17.07 27.52,15.66 R6.2
N$20
  Top 0.406: LED2.C 81.5,112.93 R57.2
N$21
  Top 0.406: Q9.1 42.17,53.93 R34.1 43.62,52.92 45.19,51.36 45.58,51.36 R33.2
N$22
  Top 0.406: R37.1 R40.1 35.14,77.16 Q11.G
N$23
  Top 0.406: R41.1 R42.1 45.3,77.16 Q12.G
N$24
  Top 0.406: R38.1 R39.1 24.82,75.09 24.82,76.78 24.39,77.21 Q10.G
N$25
  Top 0.406: R43.1 R44.1 55.46,77.16 Q13.G
N$26
  Top 0.406: Q14.G 24.98,94.94 R46.1 R45.1
N$27
  Top 0.406: Q15.G 35.14,94.94 R48.1 R47.1
N$28
  Top 0.406: R58.2 81.6,120.75 LED3.C
P1  (via drill 0.6)
  Top 0.406: R39.2 23.28,73.67 24.74,72.21 27.79,72.21 v27.89,72.31
  Bottom 0.406: U$2.37 36.7,63.5 v27.89,72.31
P1+
  Top 0.813: PIXEL1-4.8 20.22,76.84 21.92,78.54 21.92,80.3 Q10.D
  Bottom 0.813: PIXEL1-4.8 17.78,76.84 PIXEL1-4.7
P2  (via drill 0.6)
  Top 0.406: 40.11,68.6 53.31,68.6 v59.69,62.23 | 40.11,68.6 40.11,68.63 | R40.2 33.44,73.19 38.02,68.6 40.11,68.6
  Bottom 0.406: U$2.36 77.47,59.69 76.2,58.42 63.5,58.42 v59.69,62.23
P2+  (via drill 0.6)
  Top 0.813: v31.22,82.45 34.75,82.45 36.75,84.46 36.75,84.97 Q11.D
  Bottom 0.813: PIXEL1-4.5 16.87,81 17.45,81 18.36,81.91 PIXEL1-4.4 30.68,81.91 v31.22,82.45
P3  (via drill 0.6)
  Top 0.406: R42.2 43.6,73.6 46.43,70.76 48.08,70.76 v48.26,70.59
  Bottom 0.406: U$2.35 74.93,66.04 52.81,66.04 v48.26,70.59
P3+  (via drill 0.6)
  Top 0.813: PIXEL1-4.1 17.78,85.72 PIXEL1-4.2 | v42.11,84.4 46.34,84.4 Q12.D
  Bottom 0.813: PIXEL1-4.2 42.06,84.46 v42.11,84.4
P4  (via drill 0.6)
  Top 0.406: 65.99,57.2 v66.04,57.15 66.12,57.23 66.12,57.73 61.9,61.95 61.9,65.96 53.95,73.91 53.95,74.74 R44.2
  Bottom 0.406: v66.04,57.15 77.47,57.15 80.01,59.69 U$2.34
P4+  (via drill 0.6)
  Top 0.813: v52.55,84.76 56.86,84.76 Q13.D
  Bottom 0.813: 20.42,79.38 PIXEL1-4.6 | 20.42,79.38 47.17,79.38 v52.55,84.76 | PIXEL1-4.3 15.44,83.19 14.15,81.89 14.15,76.89 16.74,74.3 19.99,74.3 21.92,76.22 21.92,77.88 20.42,79.38
P5  (via drill 0.6)
  Top 0.406: R46.2 23.28,91.12 24.21,90.19 27.92,90.19 v27.94,90.17
  Bottom 0.406: U$2.33 57.52,85.99 57.15,86.36 55.98,87.53 32.41,87.53 29.77,90.17 v27.94,90.17
P5+
  Top 0.813: PIXEL5-8.8 20.78,94.62 21.92,95.76 21.92,98.08 Q14.D
  Bottom 0.813: PIXEL5-8.7 16.51,95.25 17.78,93.98 18.41,93.98 PIXEL5-8.8
P6  (via drill 0.6)
  Top 0.406: v62.97,83.06 62.97,62.76 v69.85,55.88 | v33.98,89.94 33.98,90.07 33.25,90.81 33.25,92.52 R48.2
  Bottom 0.406: v69.85,55.88 78.74,55.88 82.55,59.69 U$2.32 | v62.97,83.06 62.97,83.21 57.15,89.03 35.03,89.03 34.11,89.94 v33.98,89.94
P6+  (via drill 0.6)
  Top 0.813: v31.01,99.67 32.36,99.67 36.83,104.14 Q15.D
  Bottom 0.813: PIXEL5-8.5 17.78,99.69 PIXEL5-8.4 30.99,99.69 v31.01,99.67
P7  (via drill 0.6)
  Top 0.406: R23.2 43.6,91.76 45.06,90.3 48.13,90.3 v48.26,90.17
  Bottom 0.406: U$2.31 82.55,66.04 58.42,90.17 v48.26,90.17
P7+  (via drill 0.6)
  Top 0.813: v41.83,102.21 46.37,102.21 Q16.D
  Bottom 0.813: PIXEL5-8.1 16.84,103.84 17.02,103.84 18.62,102.24 PIXEL5-8.2 41.81,102.24 v41.83,102.21
P8
  Top 0.406: U$2.26 90.17,58.42 86.36,54.61 73.66,54.61 64.26,64.01 64.26,86.08 60.2,90.15 56.06,90.15 55.03,91.17 R29.2
P8+  (via drill 0.6)
  Top 0.813: v52.35,102.21 56.49,102.21 57.15,102.87 Q17.D
  Bottom 0.813: 20.65,97.16 PIXEL5-8.6 | 20.65,97.16 47.3,97.16 v52.35,102.21 | PIXEL5-8.3 15.14,100.97 14.12,99.95 14.12,94.44 16.33,92.23 20.27,92.23 22.02,93.98 22.02,95.78 20.65,97.16
P9
  Top 0.406: U$2.0 54.61,64.77 52.07,67.31 21.59,67.31 13.18,75.67 13.11,103.35 17.78,107.95 20.74,107.95 R49.2
P9+
  Top 0.813: PIXEL9-12.8 20.47,112.4 21.51,113.44 21.51,117.58 24.84,120.9 26.38,120.9 Q18.D
  Bottom 0.813: PIXEL9-12.7 16.51,113.28 17.65,112.14 18.8,112.14 PIXEL9-12.8
P10  (via drill 0.6)
  Top 0.406: v85.09,55.88 74.93,55.88 66.7,64.11 66.7,86.16 63.02,89.84 63.02,104.29 60.63,106.68 36.37,106.68 33.66,109.4 33.66,110.28 R51.2 | v90.17,55.88 92.71,58.42 U$2.24
  Bottom 0.406: v85.09,55.88 v90.17,55.88
P10+  (via drill 0.6)
  Top 0.813: v31.62,117.45 33.67,117.45 Q19.D
  Bottom 0.813: PIXEL9-12.5 16.54,116.18 17.17,116.18 18.47,117.47 PIXEL9-12.4 31.6,117.47 v31.62,117.45
P11
  Top 0.406: U$2.28 87.88,60.71 87.88,60.4 84.58,57.1 75.56,57.1 68.66,64.01 68.66,86.79 64.92,90.53 64.92,104.6 61.57,107.95 45.29,107.95 43.33,109.91 43.33,110.22 R53.2
P11+  (via drill 0.6)
  Top 0.813: v42.67,119.99 47.6,119.99 48.26,120.65 | 48.26,120.65 48.26,119.38 | 48.26,120.65 47.03,120.65 Q20.D
  Bottom 0.813: PIXEL9-12.1 17.78,121.28 PIXEL9-12.2 42.65,120.01 v42.67,119.99
P12
  Top 0.406: U$2.27 85.09,66.04 80.01,66.04 70.16,75.9 70.16,87.58 66.42,91.31 66.42,104.93 62.41,108.94 54.43,108.94 53.64,109.73 53.64,110.38 R55.2
P12+  (via drill 0.6)
  Top 0.813: v51.94,120.09 56.63,120.09 Q21.D
  Bottom 0.813: 21.11,114.94 PIXEL9-12.6 | 21.11,114.94 46.79,114.94 v51.94,120.09 | PIXEL9-12.3 15.21,118.75 13.79,117.32 13.79,112.55 15.8,110.54 20.4,110.54 21.72,111.86 21.72,114.32 21.11,114.94
PWM_B1  (via drill 0.6)
  Top 0.406: v40.31,15.29 42.81,15.29 R15.2
  Bottom 0.406: U$2.14 45.34,20.32 v40.31,15.29
PWM_B2  (via drill 0.6)
  Top 0.406: v40.64,33.02 42.76,33.02 R25.2
  Bottom 0.406: U$2.8 45.72,38.1 v40.64,33.02
PWM_B3  (via drill 0.6)
  Top 0.406: v40.26,51.08 43.04,51.08 R34.2
  Bottom 0.406: U$2.3 42.52,53.34 v40.26,51.08
PWM_G1  (via drill 0.6)
  Top 0.406: v31.83,15.34 33.97,15.34 R12.2
  Bottom 0.406: U$2.12 44.42,27.94 v31.83,15.34
PWM_G2  (via drill 0.6)
  Top 0.406: v31.55,33.22 34.07,33.22 R22.2
  Bottom 0.406: U$2.7 41.5,43.18 v31.55,33.22
PWM_G3  (via drill 0.6)
  Top 0.406: v31.75,50.98 34.05,50.98 R31.2
  Bottom 0.406: U$2.2 36.65,55.88 v31.75,50.98
PWM_R1  (via drill 0.6)
  Top 0.406: v22.86,15.24 24.98,15.24 R17.2
  Bottom 0.406: U$2.11 38.1,30.48 v22.86,15.24
PWM_R2  (via drill 0.6)
  Top 0.406: v22.45,33.3 25.26,33.3 R19.2
  Bottom 0.406: U$2.6 34.87,45.72 v22.45,33.3
PWM_R3  (via drill 0.6)
  Top 0.406: v22.63,50.98 25.16,50.98 R28.2
  Bottom 0.406: U$2.1 30.07,58.42 v22.63,50.98
R1
  Top 0.813: PWM1.1 17.78,27.3 PWM1.2 26.07,26.04 Q1.2
R2
  Top 0.813: Q4.2 19.64,44.41 PWM2.2 17.78,45.09 PWM2.1
R3
  Top 0.813: PWM3.1 17.78,62.87 PWM3.2 26.07,61.59 Q7.2
RX  (via drill 0.6)
  Top 0.406: IC3.1 98.42,113.44 v98.37,113.39 | v98.4,95.66 98.4,97.71 IC1.1 | v93.8,95.71 87.27,89.18 87.27,72.41 v87.66,72.03 | JP1.6 77.47,43.18 v82.55,48.26
  Bottom 0.406: v98.37,113.39 98.37,95.68 v98.4,95.66 98.35,95.71 v93.8,95.71 | v87.66,72.03 92.96,66.73 93.22,66.73 93.22,66.7 95.1,64.82 95.1,61.14 92.15,58.19 87.86,58.19 U$2.30 85.09,59.69 82.55,57.15 v82.55,48.26
RX_EN1
  Top 0.406: IC3.2 99.7,112.07 R10.2 98.82,111.68 98.17,111.68 95.33,108.84 95.33,95.17 88.9,88.75 88.9,64.77 U$2.25
RX_EN2
  Top 0.406: IC1.2 99.7,94.29 R3.2 98.77,93.96 98.55,93.96 92.56,87.96 92.56,87.94 91.75,87.12 91.75,69.22 95.68,65.28 95.68,58.85 U$2.21 95.25,58.75
SCL
  Top 0.406: U$3.7 102.23,86.79 101.37,87.66 97.87,87.66 95.25,85.04 95.25,80.01 96.1,79.16 R36.2 99.52,76.16 99.52,56.44 95.89,52.81 60.02,52.81 55.37,48.16 54.71,48.16 U$2.5
SDA
  Top 0.406: U$3.1 100.97,79.27 100.28,78.59 100.1,78.59 | R35.2 99.63,78.59 100.1,78.59 | 100.1,78.59 100.74,77.95 100.74,55.5 96.22,50.98 64.95,50.98 58.42,44.45 58.42,38.1 55.88,35.56 U$2.9 54.71,35.66
TX  (via drill 0.6)
  Top 0.406: IC3.4 102.23,113.51 v102.18,113.46 | v102.18,95.63 102.18,97.68 IC1.4 | v90.09,94.36 86.26,90.53 86.23,90.53 85.88,90.17 85.88,68.78 v86.34,68.33 86.26,68.4 | JP1.5 80.01,39.04 v89.1,48.13 | v92.2,54.25 92.2,56.79 93.4,57.99 93.4,59.46 94.82,60.88 94.82,64.77 92.48,67.11 92.33,67.11 v91.52,66.29
  Bottom 0.406: v102.18,95.63 v102.18,113.46 | v102.18,95.63 102.23,95.58 | 85.09,65.13 U$2.29 84.94,63.65 84.94,66.93 v86.34,68.33 88.37,66.29 v91.52,66.29 | v90.09,94.36 100.91,94.36 v102.18,95.63 | v89.1,48.13 89.1,51.16 v92.2,54.25
TX_EN1
  Top 0.406: IC3.3 100.97,112.07 R11.2 101.84,111.68 102.82,111.68 104.72,109.78 104.72,108.69 102.54,106.5 99.16,106.5 96.65,103.99 96.65,94.41 90.22,87.99 90.22,65.99 U$2.23
TX_EN2
  Top 0.406: IC1.3 100.97,94.29 R4.2 101.9,93.96 102.44,93.96 104.29,92.1 104.29,90.45 102.79,88.95 97.33,88.95 93.5,85.52 93.5,69.16 97.79,64.77 97.79,57 96.65,55.85 95.28,55.85 U$2.22

## Text on the board
tPlace: PIXELS9-12 | PIXELS5-8 | PIXELS1-4 | RGB3 | RGB2 | - | + | RGB1 | GND | RX | TX | EXTRA1 | EXTRA2 | EXTRA3 | 5V
tNames: LED CONTROLLER v1.0 | NIT WHIPS : BURNING MAN 2011